# Allegro board WD7992A_SiderkeyFPC_V1_power_A.brd
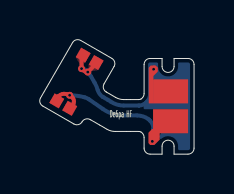
[diagram p0: board, top side]
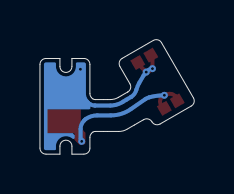
[diagram p1: board, bottom side, seen from below]

Outline 7.71 x 5.73 mm; copper layers: TOP, BOTTOM. Coordinates in mm from the lower left corner of the outline.
Outline path: 0.14,2.41 arc(0,2.59) 0.03,2.82 1.63,5.59 arc(1.81,5.73) 2.04,5.7 3.6,4.8 arc(3.74,4.62) 3.71,4.39 3.21,3.53 arc(3.18,3.3) 3.32,3.12 3.33,3.11 3.79,2.85 3.79,2.85 arc(3.98,2.77) 4.19,2.74 4.94,2.74 4.96,2.74 arc(5.01,2.75) 5.06,2.77 arc(5.1,2.8) 5.14,2.84 arc(5.19,2.93) 5.21,3.04 5.21,4.5 arc(5.3,4.71) 5.51,4.8 6.11,4.8 6.11,4.4 arc(6.41,4.1) 6.71,4.4 6.71,4.8 7.41,4.8 arc(7.62,4.71) 7.71,4.5 7.71,0.3 arc(7.62,0.09) 7.41,0 6.71,0 6.71,0.4 arc(6.41,0.7) 6.11,0.4 6.11,0 5.51,0 arc(5.3,0.09) 5.21,0.3 5.21,0.84 arc(5.19,0.95) 5.14,1.04 arc(5.1,1.08) 5.06,1.11 arc(5.01,1.13) 4.96,1.14 4.94,1.14 3.76,1.14 arc(3.55,1.17) 3.36,1.25 2.99,1.46 2.53,1.73 2.52,1.73 arc(2.29,1.76) 2.11,1.62 arc(1.93,1.48) 1.7,1.51 0.14,2.41

## Design rules (mm)
constraint set DEFAULT: min track width 0.075, pair gap 0.1

## Placement (name value [footprint] x y rotation side)
J3501  -  [TP1]  6.61 1.65 90 top
J3502  -  [TP1]  6.61 3.15 90 top
NOREF  -  []  -2159.87 -2172.93 0 top
SW3501  EVPBB4A9BT02  [SWITCH4_3X1D6X0D65]  1.83 3.63 240 top

## Library data of the parts
J3501 J3502 = TP1
SW3501 = EVPBB4A9BT02

## Footprints (pads in the part's own frame, mm; a bottom-side part is the same pattern mirrored in y, then rotated)
SWITCH4_3X1D6X0D65
  rect 0.55x0.55 smd: A1(-1.325,0.375) A2(-1.325,-0.375) B1(1.325,0.375) B2(1.325,-0.375)
TP1
  round 1 smd: 1(0,0)

## Nets
GND: J3502.1 SW3501.A1 SW3501.A2
POWER_ON_N: J3501.1 SW3501.B1 SW3501.B2

## Via types
v1: diameter 0.35, hole 0.15, TOP to BOTTOM, 5 vias

## Routing (per net, layer and track width the routed paths; a pad name or vN(x,y) marks a point on that pad's centre or on a via; arc(x,y) is an arc through that point)
GND: length 6
  TOP w0.2: SW3501.A1 arc(2.8,4.54) 2.77,4.5 v1(2.39,4.12) arc(2.27,4.14) 2.16,4.21 v1(2.08,4.29) 2.08,4.77 arc(2.1,4.88) SW3501.A2
  BOTTOM w0.2: 5.37,2.65 arc(5.29,2.57) 5.2,2.5 arc(5.09,2.46) 4.97,2.44 4.95,2.44 4.19,2.44 arc(4.07,2.44) 3.96,2.46 arc(3.74,2.53) 3.55,2.63 arc(3.47,2.68) 3.39,2.73 3.15,2.87 arc(2.99,3.02) 2.89,3.23 arc(2.83,3.4) 2.74,3.57 2.53,3.95 arc(2.46,4.04) v1(2.39,4.12) 2.32,4.19 arc(2.21,4.26) v1(2.08,4.29)
  vias: v1(5.69,4.26)
POWER_ON_N: length 7.1
  TOP w0.2: SW3501.B1 1.61,2.42 arc(1.7,2.63) 1.62,2.85 1.62,2.85 arc(1.56,2.91) v1(1.49,2.95) arc(1.42,2.98) 1.34,3.01 arc(1.33,3.01) 1.32,3.01 arc(1.12,3.02) 0.95,2.92 arc(0.94,2.91) 0.94,2.91 0.94,2.91 arc(0.86,2.8) SW3501.B2
  BOTTOM w0.2: v1(5.62,0.64) arc(5.66,0.7) 5.68,0.77 5.68,1.26 arc(5.63,1.49) 5.5,1.68 5.43,1.76 arc(5.16,1.89) 4.85,1.94 4.17,1.94 arc(3.64,2.02) 3.16,2.26 2.45,2.75 arc(2.35,2.81) 2.25,2.85 arc(1.87,2.93) v1(1.49,2.95)

## Copper pours and planes (outline as drawn; the poured copper is in the pictures)
GND on TOP (solid shape): 7.41,2.55 5.66,2.55 5.66,3.75 7.41,3.75
GND on BOTTOM (solid shape): 5.85,4.6 5.89,4.58 5.91,4.53 5.91,4.4 6.41,3.9 6.91,4.4 6.91,4.53 6.93,4.58 6.98,4.6 7.41,4.6 7.48,4.57 7.51,4.5 7.51,0.3 7.48,0.23 7.41,0.2 6.98,0.2 6.93,0.22 6.91,0.27 6.91,0.4 6.77,0.75 6.41,0.9 6.26,0.88 6.18,0.84 6.09,0.78 6.02,0.77 5.98,0.83 5.97,0.91 5.98,0.94 6.05,1.03 6.07,1.04 6.1,1.05 7.34,1.05 7.34,2.25 5.25,2.25 5.21,2.27 5.19,2.32 5.19,2.57 5.21,2.63 5.26,2.67 5.38,2.87 5.41,3.04 5.41,4.5 5.44,4.57 5.51,4.6
POWER_ON_N on TOP (solid shape): 7.41,1.05 5.66,1.05 5.66,2.25 7.41,2.25

Small or netless copper shapes (teardrops, artwork), in the pictures only: 5 on TOP, 2 on BOTTOM

## Text on the board
Ref Des/Silkscreen Top: De6pa HF
User.33: FIGURE | FINISHED_SIZE | 0.15 | DRILL CHART: TOP to BOTTOM | ALL UNITS ARE IN MILLIMETERS | PLATED | QTY | 5 | TOTAL HOLES:
